# EAGLE board Stoplight_Feather_PCB_v3000 (EAGLE 9.7.0)
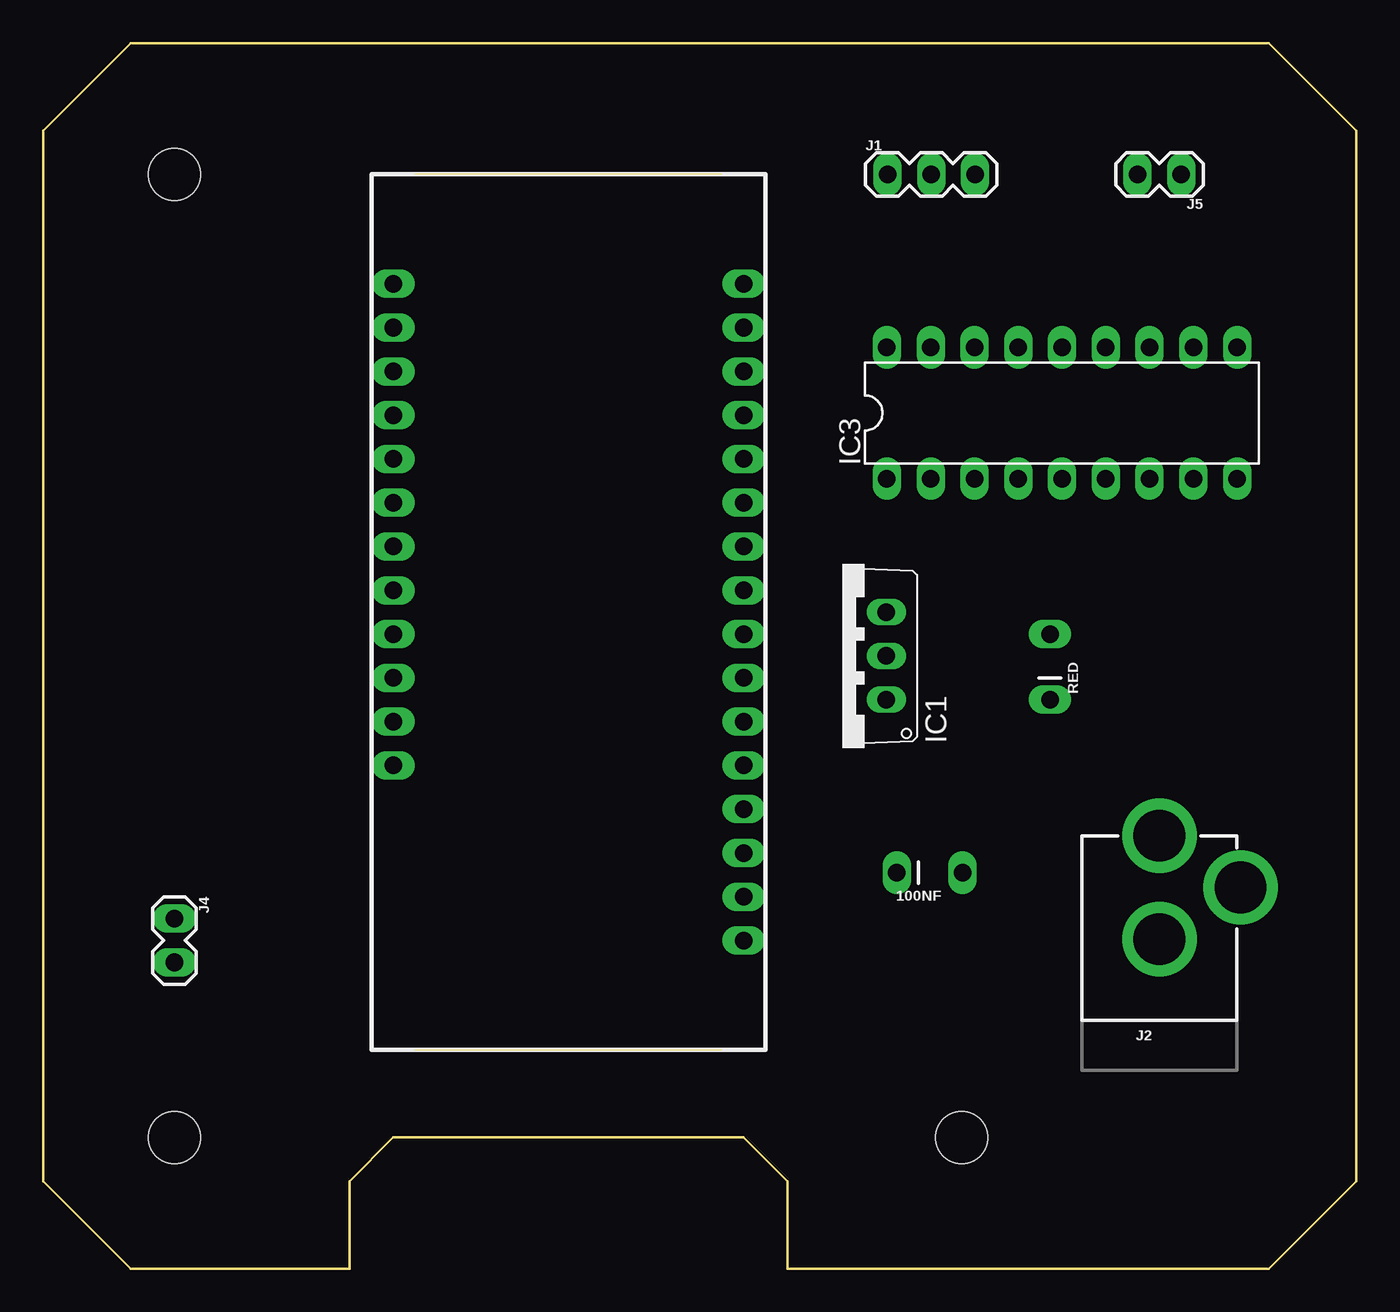
[diagram p0: board, top side]
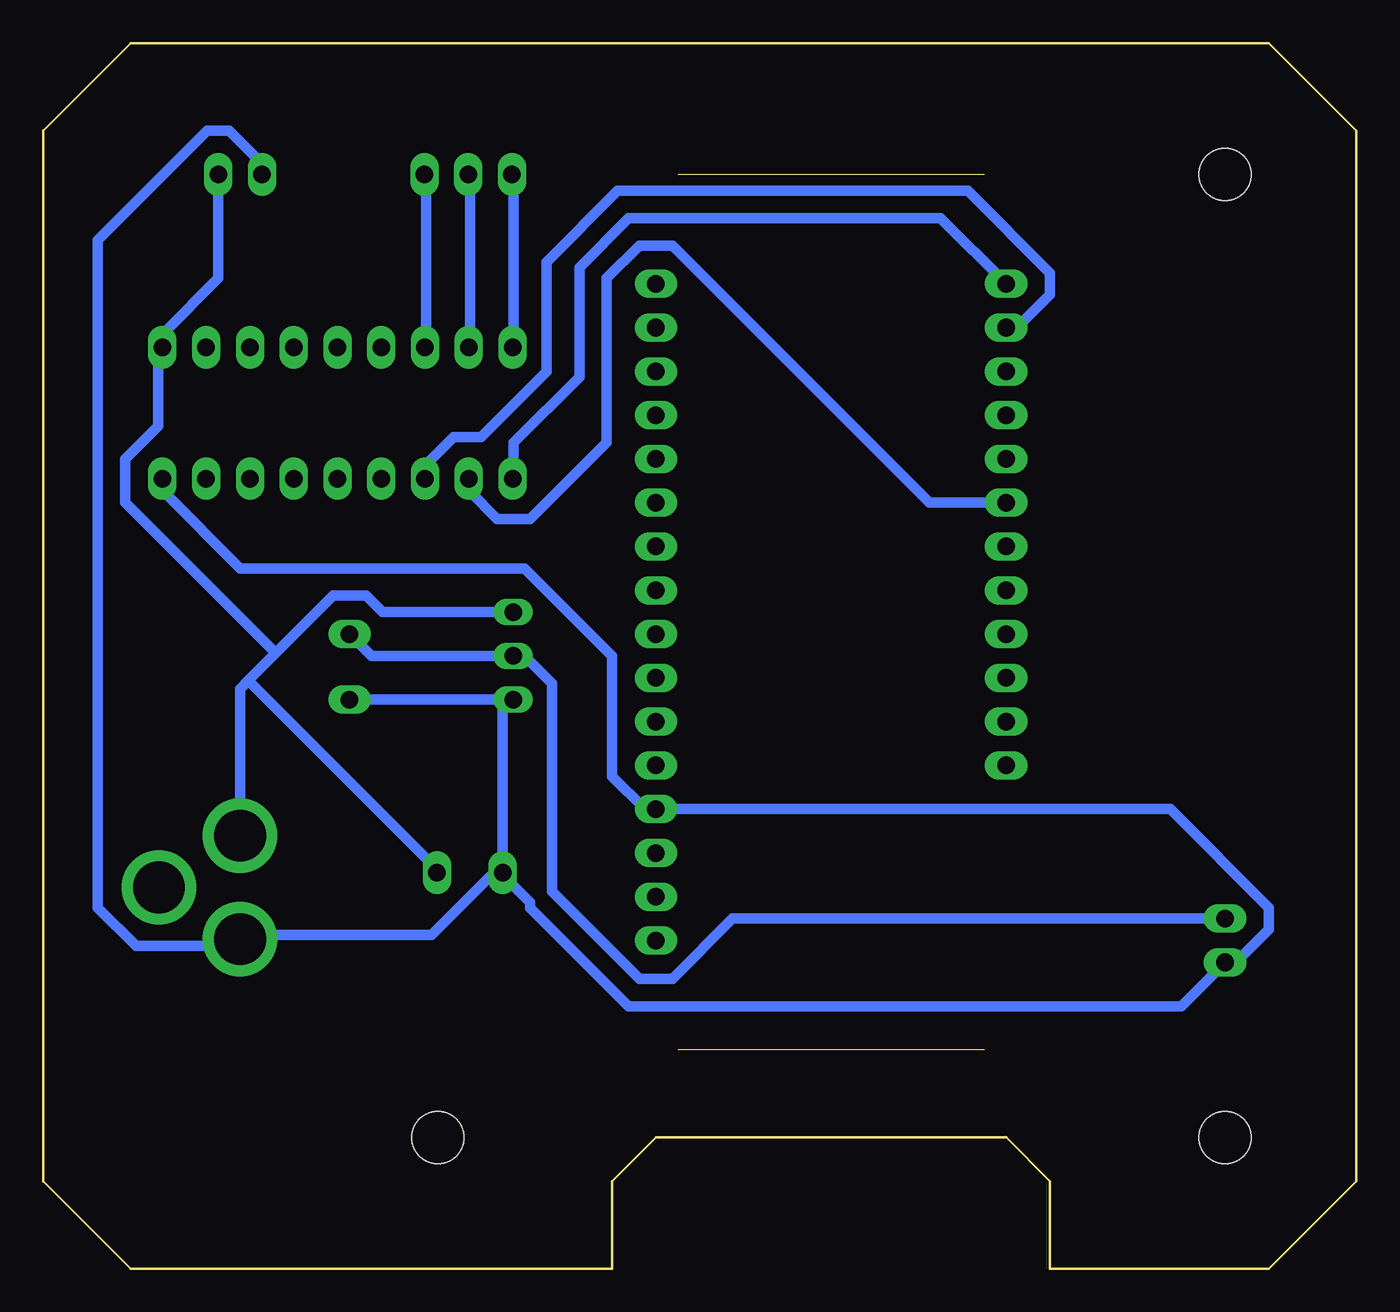
[diagram p1: board, bottom side, seen from below]

Size 76.2 x 71.12 mm. Coordinates in mm from the lower left corner, seen from the top.
Outline: 0,66.04 0,5.08 5.08,0 17.78,0 17.78,5.08 20.32,7.62 40.64,7.62 43.18,5.08 43.18,0 71.12,0 76.2,5.08 76.2,66.04 71.12,71.12 5.08,71.12 0,66.04
Copper layers (1*16): Top / Bottom
Stack-up Default Layer Stack: Top User Defined 0.035mm / Dielectric-1 User Defined 1.5mm / Bottom User Defined 0.035mm
Design rules "OthermillDRC_1_32_v2": minimum track width 8mil, minimum drill 0.8mm, track to track 0.794003125mm, track to pad 0.794003125mm, pad to pad 0.794003125mm, via to via 0.794003125mm, smd to smd 0mil, copper to edge 0mil, drill to drill 1mil, minimum pad ring 10mil, minimum via ring 10mil, stop-mask expansion 1mil, vias tented up to drill 30mil, thermal gap 10mil
Net classes: 0 default: width 0.61 mm, drill 0.61 mm, clearance 0.61 mm
Holes 3 mm at 7.62,63.5 7.62,7.62 53.29,7.62

## Footprints (pad centres in the part's own frame; a part is rotated, then mirrored left to right if it is on the bottom)
CAP-PTH-2.54 = drill 1.016 pad 1.651 long: 1 -2.54,0; 2 1.27,0
TO220V = drill 1.016 long: 1 -2.54,-2.54; 2 0,-2.54; 3 2.54,-2.54
DIL18 = drill 1.016 pad 1.651 long: 1 -10.16,-3.81; 2 -7.62,-3.81; 3 -5.08,-3.81; 4 -2.54,-3.81; 5 0,-3.81; 6 2.54,-3.81; 7 5.08,-3.81; 8 7.62,-3.81; 9 10.16,-3.81; 10 10.16,3.81; 11 7.62,3.81; 12 5.08,3.81; 13 2.54,3.81; 14 0,3.81; 15 -2.54,3.81; 16 -5.08,3.81; 17 -7.62,3.81; 18 -10.16,3.81
1X03 = drill 1.016 pad 1.651 long: 1 0,0; 2 2.54,0; 3 5.08,0
POWER_JACK_PTH = drill 2.997 pad 4.318: GND 0,7.7; GNDBREAK 4.7,10.7; PWR 0,13.7
1X02 = drill 1.016 pad 1.651 long: 1 0,0; 2 2.54,0
FEATHERWING = drill 1.016 pad 1.651 long: 1 6.35,1.27; 2 8.89,1.27; 3 11.43,1.27; 4 13.97,1.27; 5 16.51,1.27; 6 19.05,1.27; 7 21.59,1.27; 8 24.13,1.27; 9 26.67,1.27; 10 29.21,1.27; 11 31.75,1.27; 12 34.29,1.27; 13 36.83,1.27; 14 39.37,1.27; 15 41.91,1.27; 16 44.45,1.27; 17 44.45,21.59; 18 41.91,21.59; 19 39.37,21.59; 20 36.83,21.59; 21 34.29,21.59; 22 31.75,21.59; 23 29.21,21.59; 24 26.67,21.59; 25 24.13,21.59; 26 21.59,21.59; 27 19.05,21.59; 28 16.51,21.59

## Placement (x,y rotation side)
100NF  22pF  [CAP-PTH-2.54]  50.8,22.99 180 top
IC1  7805TV  [TO220V]  46.39,35.56 90 top
IC3  [DIL18]  59.12,49.66 0 top
J1  [1X03]  48.99,63.5 0 top
J2  POWER_JACK  [POWER_JACK_PTH]  64.77,11.43 0 top
J4  [1X02]  7.62,20.32 270 top
J5  [1X02]  66.04,63.5 180 top
MS1  FEATHERWING  [FEATHERWING]  41.91,12.7 90 top
RED  22pF  [CAP-PTH-2.54]  58.42,34.29 270 top

## Library data of the parts
100NF RED = Capacitor Long Pads; PROD_ID: CAP-09128
IC1 = LD33v
IC3 = ULN2803 Long Pads
J1 = 3 pin header Long pad
J2 = SparkFun-Connectors; PROD_ID: CONN-08197
J4 J5 = Clark's Library
MS1 = Feather Huzzah Long Pads

## Nets
3.3V: IC1.2 J4.1 RED.1
5V: 100NF.1 IC1.3 IC3.10 J2.PWR J5.1
GND: 100NF.2 IC1.1 IC3.9 J2.GND J4.2 J5.2 MS1.4 RED.2
GREEN: IC3.1 MS1.17
N$1: J2.GNDBREAK
N$2: IC3.18 J1.1
N$3: IC3.17 J1.2
N$4: IC3.16 J1.3
RED: IC3.3 MS1.18
YELLOW: IC3.2 MS1.22

## Tracks (layer width: path | path; a pad name or v marks a point on that pad's centre or on a via)
3.3V
  Bottom 0.61: RED.1 57.15,35.56 IC1.2 48.26,35.56 46.67,33.97 46.67,21.91 41.59,16.83 39.69,16.83 36.2,20.32 J4.1
5V
  Bottom 0.61: J5.1 66.04,57.47 69.22,54.29 69.22,53.66 IC3.10 69.53,53.34 69.53,48.89 71.44,46.99 71.44,44.45 62.71,35.72 | IC1.3 56.51,38.1 57.47,39.05 59.37,39.05 62.71,35.72 | 64.29,34.13 64.77,33.66 J2.PWR | 64.29,34.13 62.71,35.72 | 64.29,34.13 53.34,23.18 100NF.1
GND
  Bottom 0.61: RED.2 49.53,33.02 | 49.53,33.02 IC1.1 49.21,33.02 | 49.53,33.02 100NF.2 49.53,22.86 | J5.2 63.5,64.13 65.41,66.04 66.68,66.04 73.03,59.69 73.03,20.96 70.8,18.73 65.09,18.73 64.77,19.05 J2.GND 64.77,19.37 53.66,19.37 50.16,22.86 49.53,22.86 | IC3.9 69.22,45.72 69.22,45.08 64.77,40.64 48.26,40.64 43.18,35.56 43.18,28.57 41.27,26.67 MS1.4 10.79,26.67 5.08,20.96 5.08,19.68 6.99,17.78 J4.2 10.16,15.24 42.23,15.24 47.94,20.96 47.94,21.27 49.53,22.86
GREEN
  Bottom 0.61: MS1.17 24.13,60.96 42.23,60.96 45.09,58.1 45.09,51.75 48.9,47.94 48.9,46.04 IC3.1
N$2
  Bottom 0.61: IC3.18 48.9,53.66 48.9,63.5 J1.1
N$3
  Bottom 0.61: IC3.17 51.43,53.66 51.43,63.5 J1.2
N$4
  Bottom 0.61: IC3.16 53.98,53.66 53.98,63.5 J1.3
RED
  Bottom 0.61: MS1.18 19.68,54.61 17.78,56.52 17.78,57.78 22.54,62.55 42.86,62.55 46.99,58.42 46.99,52.07 50.8,48.26 52.39,48.26 53.98,46.67 53.98,46.04 IC3.3
YELLOW
  Bottom 0.61: MS1.22 24.77,44.45 39.69,59.37 41.59,59.37 43.5,57.47 43.5,47.94 47.94,43.5 49.85,43.5 51.43,45.08 51.43,45.72 IC3.2